# Altium PCB CanBusTester.PcbDoc
Units mil, origin at the board's own origin, x right, y up, seen from the top; angles counter-clockwise.
Board outline 6000 x 4000 mil, 2 copper layers (Top Layer, Bottom Layer); 28 components, 38 nets, 206 pads, 0 vias.
Unrouted connection lines stored in the file: 95.
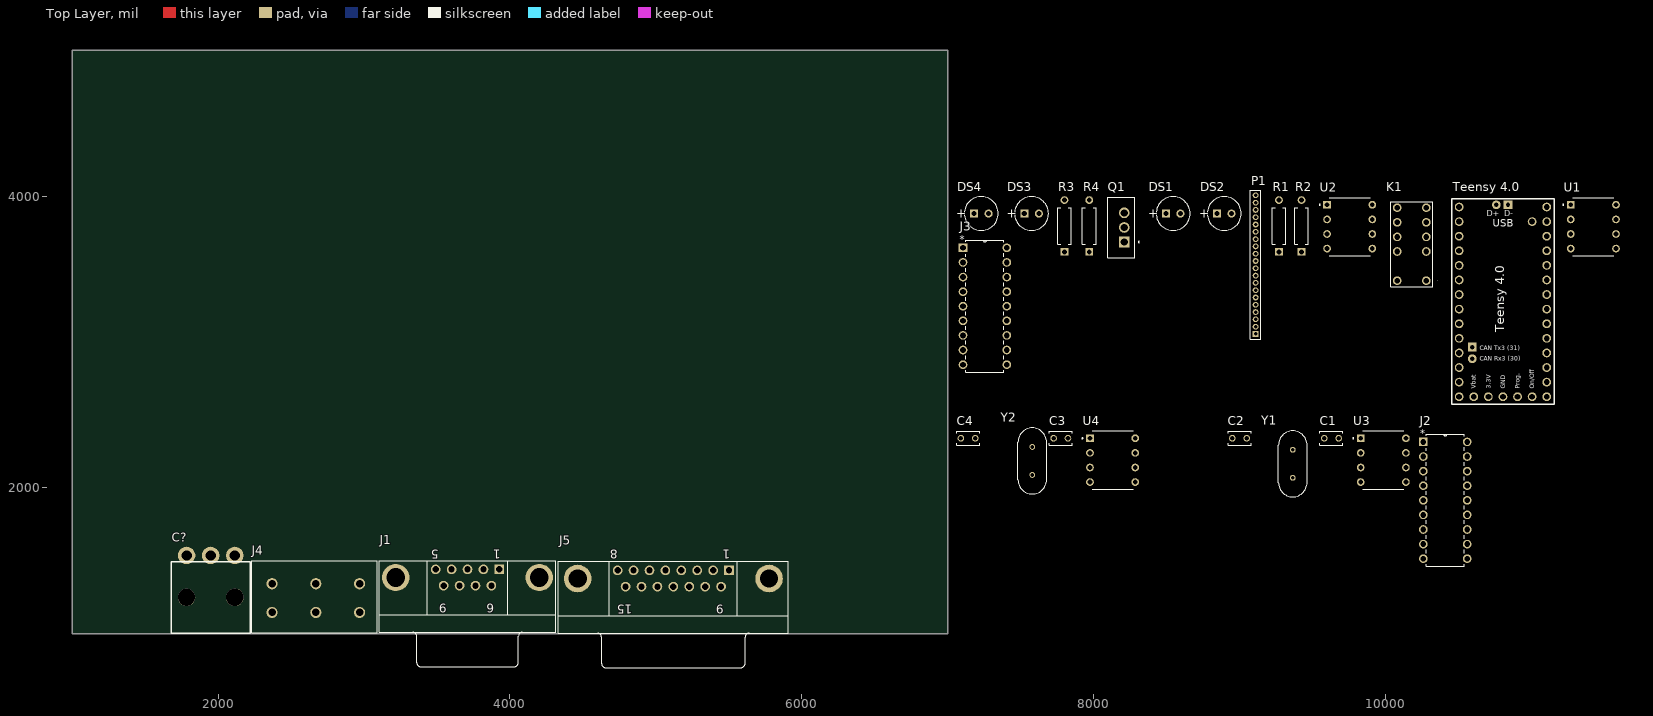
[diagram p0: Top Layer view]
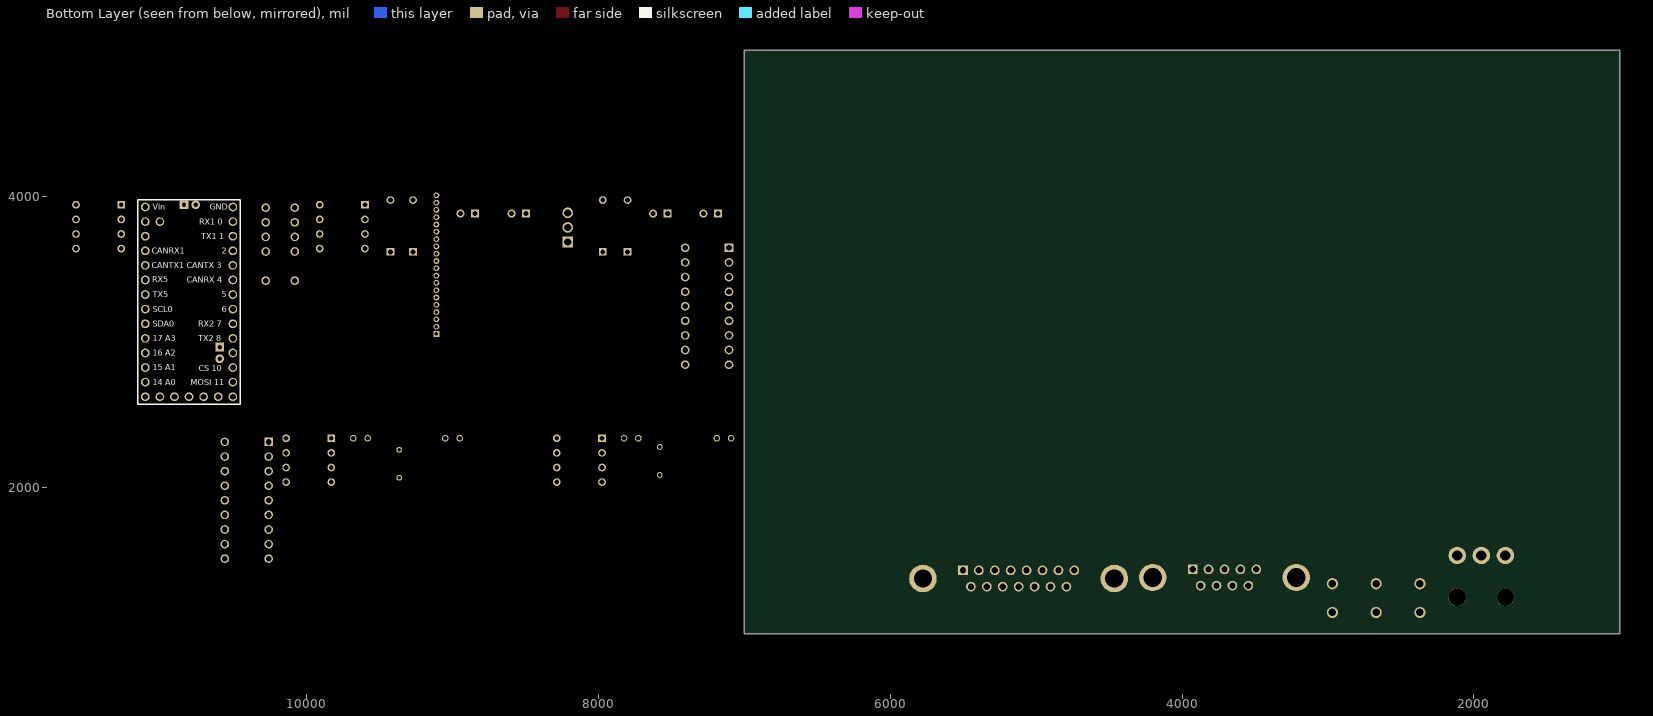
[diagram p1: Bottom Layer view, seen from below]

## Layer stack, top to bottom
Top Solder: solder mask 0.4, Solder Resist, Dk 3.5
Top Layer: signal copper 1.4
Dielectric 1: dielectric 12.6, FR-4, Dk 4.8
Bottom Layer: signal copper 1.4
Bottom Solder: solder mask 0.4, Solder Resist, Dk 3.5

## Board outline
1000,1000 7000,1000 7000,5000 1000,5000

## Design rules (kind name [scope] priority, off if disabled: settings)
Clearance [All] p1: gap=10 ignorepadtopadclearanceinfootprint=FALSE except(0: Arc-Hole Track-Hole SMDPad-Hole THPad-Hole Via-Hole Fill-Hole Poly-Hole Region-Hole Text-Hole)
PolygonConnect [All] p1: connectstyle=Relief reliefconductorwidth=10 reliefentries=4 polygonreliefangle="90 Angle" airgapwidth=10
RoomDefinition Connectors [InComponentClass('Connectors')] p1: confinementstyle=ConfineIn formatcopy=TRUE lockcomponents=FALSE outline 7045,4160 9900,4160 9900,5860 7045,5860
RoomDefinition CircuitBoard [InComponentClass('CircuitBoard')] p2: confinementstyle=ConfineIn formatcopy=TRUE lockcomponents=FALSE outline 7045,2565 11625,2565 11625,4110 7045,4110
RoomDefinition CanControllers [InComponentClass('CanControllers')] p3: confinementstyle=ConfineIn formatcopy=TRUE lockcomponents=FALSE outline 7045,1060 10720,1060 10720,2510 7045,2510
RoutingVias [All] p1: holewidth=28 width=50 viastyle="Through Hole" minholewidth=28 minwidth=50 maxholewidth=28 maxwidth=50
SolderMaskExpansion [All] p1: expansion=4 istentingtop=FALSE
Width [All] p1: maxlimit=10 minlimit=10 preferedwidth=10
30 further rules are at their usual default settings.

## Classes and differential pairs
component class Connectors: C? J1 J4 J5
component class CircuitBoard: DS1 DS2 DS3 DS4 K1 P1 Q1 R1 R2 R3 R4 "Teensy 4.0" U1 U2
component class CanControllers: C1 C2 C3 C4 J2 J3 U3 U4 Y1 Y2

## Components (designator, comment, footprint, x,y, rotation, side; value= is the part's Value field where it differs from the comment)
C1 "FG18C0G2A180JNT06" CAPRB250W50L400T250H550 9630,2340 r0 top
C2 "FG18C0G2A180JNT06" CAPRB250W50L400T250H550 9000,2340 r0 top
C3 "FG18C0G2A180JNT06" CAPRB250W50L400T250H550 7775,2340 r0 top
C4 "FG18C0G2A180JNT06" CAPRB250W50L400T250H550 7140,2340 r0 top
C? "3PinMolex" 3PinMolex 1949.5,1249 r0 top
DS1 "WP7113SGC" KING-WP7113SGC_V 8545,3880 r0 top
DS2 "WP7113SGC" KING-WP7113SGC_V 8895,3880 r0 top
DS3 "WP7113SGC" KING-WP7113SGC_V 7575,3880 r0 top
DS4 "WP7113SGC" KING-WP7113SGC_V 7230,3880 r0 top
J1 "D Connector 9" DSUB1.385-2H9 3709.53,1011.89 r180 top
J2 "MCP2515-I/P" DIP254P762X432-18 10560,1515 r0 top
J3 "MCP2515-I/P" DIP254P762X432-18 7405,2845 r0 top
J4 "691411410003" 691411410003 2670,1245 r180 top
J5 "D Connector 15" DSUB1.385-2H15 5120,1005 r180 top
K1 "G6SK-2-DC5" G6SK2DC5 10280,3420 r90 top
P1 "320x480TFT" MHDR1X20 9110,3055 r90 top
Q1 "LM7805CT/NOPB" TO254P1054X470X1955-3 8210,3785 r90 top
R1 "MFR-25FBF52-221R" RESA60-630X240 9270,3795 r90 top value=221
R2 "MFR-25FBF52-221R" RESA60-630X240 9425,3795 r90 top value=221
R3 "MFR-25FBF52-221R" RESA60-630X240 7800,3795 r90 top value=221
R4 "MFR-25FBF52-221R" RESA60-630X240 7970,3795 r90 top value=221
"Teensy 4.0" "Teensy_4.0" "Teensy 4.0" 10505,2625 r0 top
U1 "MCP2562-E/P" DIP787W45P254L1016H533Q8 11425,3790 r0 top
U2 "MCP2562-E/P" DIP787W45P254L1016H533Q8 9755,3790 r0 top
U3 "MCP2562-E/P" DIP787W45P254L1016H533Q8 9985,2190 r0 top
U4 "MCP2562-E/P" DIP787W45P254L1016H533Q8 8130,2190 r0 top
Y1 "ABL-16.000MHZ-B2" XTAL_HC49P488W46L1150T500H350 9365,2165 r90 top
Y2 "ABL-16.000MHZ-B2" XTAL_HC49P488W46L1150T500H350 7580,2185 r90 top

## Footprints (in the part's own frame and the unit in brackets; to place one, negate y for a bottom-side part, rotate by r counter-clockwise, add the part's x,y. Pads: shape width x height; smd on the part's side, far side on the other; paste and mask are expansions set on the pad)
3PinMolex [mil]
  round 120 hole 118: 0(-165.5,1) 0(165.5,1)
  round 120 hole 71: 1(-165,288) 2(0,288) 3(165,288)
  silkscreen extent -270,-245 270,245
691411410003 [mm]
  round 1.95 hole 1.3: 1(-7.62,2.5) 2(0,2.5) 3(7.62,2.5) A1(-7.62,-2.5) A2(0,-2.5) A3(7.62,-2.5)
  silkscreen extent -10.7,-6.5 11.12,6
CAPRB250W50L400T250H550 [mm]
  round 1.15 hole 0.8: 1(-1.25,0) 2(1.25,0)
  silkscreen extent -2,-1.25 2,1.25
DIP254P762X432-18 [mil]
  rect 59x59 hole 39: 1(-300,800)
  round 59 hole 39: 2(-300,700) 3(-300,600) 4(-300,500) 5(-300,400) 6(-300,300) 7(-300,200) 8(-300,100) 9(-300,0) 10(0,0) 11(0,100) 12(0,200) 13(0,300) 14(0,400) 15(0,500) 16(0,600) 17(0,700) 18(0,800)
  silkscreen extent -280,-53 -20,853, body extent -155,-450 155,450, height 210
DIP787W45P254L1016H533Q8 [mil]
  rect 52.68x52.68 hole 32.68: 1(-155,150)
  round 52.68 hole 32.68: 2(-155,50) 3(-155,-50) 4(-155,-150) 5(155,-150) 6(155,-50) 7(155,50) 8(155,150)
  silkscreen extent -210,-200 140,200
DSUB1.385-2H9 [mm] "Connector; D Subminiature; 9 Position; Right Angle; Pitch 1.385 mm"
  rect 1.69x1.69 hole 1.09: 1(-5.54,-10.92)
  round 1.69 hole 1.09: 2(-2.77,-10.92) 3(0,-10.92) 4(2.77,-10.92) 5(5.54,-10.92) 6(-4.155,-8.08) 7(-1.385,-8.08) 8(1.385,-8.08) 9(4.155,-8.08)
  round 4.76 hole 3.26: 10(-12.495,-9.5) 11(12.495,-9.5)
  silkscreen extent -15.4,-12.4 15.4,6
DSUB1.385-2H15 [mm] "Connector; D Subminiature; 15 Position; Right Angle; Pitch 1.385 mm"
  rect 1.69x1.69 hole 1.09: 1(-9.695,-10.92)
  round 1.69 hole 1.09: 2(-6.925,-10.92) 3(-4.155,-10.92) 4(-1.385,-10.92) 5(1.385,-10.92) 6(4.155,-10.92) 7(6.925,-10.92) 8(9.695,-10.92) 9(-8.31,-8.08) 10(-5.54,-8.08) 11(-2.77,-8.08) 12(0,-8.08) 13(2.77,-8.08) 14(5.54,-8.08) 15(8.31,-8.08)
  round 4.8 hole 3.18: 16(-16.66,-9.5) 17(16.66,-9.5)
  silkscreen extent -20,-12.5 20,6
G6SK2DC5 [mm]
  round 1.5 hole 1: 1(0,0) 3(5.08,0) 4(7.62,0) 5(10.16,0) 6(12.7,0) 7(12.7,5.08) 8(10.16,5.08) 9(7.62,5.08) 10(5.08,5.08) 12(0,5.08)
  silkscreen extent -1.05,-1.97 13.75,6.19, body extent -1.05,-1.11 13.75,6.19, height 9.5
KING-WP7113SGC_V [mm] "THD, 2-Leads, Dia 5.9mm, Body Length 8.6mm"
  rect 1.4x1.4 hole 0.889: 1(-1.27,0)
  round 1.4 hole 0.889: 2(1.27,0)
  silkscreen extent -2.95,-2.95 2.95,2.95, body extent -2.95,-2.95 2.5,2.95, height 15.5
MHDR1X20 [mm] "Connector; Header; 20 Position"
  rect 1x1 hole 0.6: 1(0,0)
  round 1 hole 0.6: 2(1.27,0) 3(2.54,0) 4(3.81,0) 5(5.08,0) 6(6.35,0) 7(7.62,0) 8(8.89,0) 9(10.16,0) 10(11.43,0) 11(12.7,0) 12(13.97,0) 13(15.24,0) 14(16.51,0) 15(17.78,0) 16(19.05,0) 17(20.32,0) 18(21.59,0) 19(22.86,0) 20(24.13,0)
  silkscreen extent -0.9,-0.9 25.03,0.9
RESA60-630X240 [mm] "Axial Resistor, 2-Leads, Dia 2.4mm, Body Length 6.3mm"
  rect 1.35x1.35 hole 0.85: 1(-4.5,0)
  round 1.35 hole 0.85: 2(4.5,0)
  silkscreen extent -3.15,-1.2 3.15,1.2, body extent -4.77,-1.19 4.77,1.2, height 2.4
"Teensy 4.0" [mil] "32 bit Arduino Compatible Microcontroller www.pjrc.com/teensy"
  round 60 hole 40: 0(0,1200) 1(0,1100) 2(0,1000) 3(0,900) 3V3a(600,1100) 3V3b(200,0) 4(0,800) 5(0,700) 6(0,600) 7(0,500) 8(0,400) 9(0,300) 10(0,200) 11(0,100) 12(0,0) 13(600,0) 14(600,100) 15(600,200) 16(600,300) 17(600,400) 18(600,500) 19(600,600) 20(600,700) 21(600,800) 22(600,900) 23(600,1000) G1(0,1300) G2(600,1200) G3(300,0) On(500,0) P(400,0) VBat(100,0) Vin(600,1300) VUSB(500,1200)
  round 60 hole 30: CRX3(90,260) D+(255,1315)
  rect 60x60 hole 30: CTX3(90,340) D-(335,1315)
  silkscreen extent -50,-50 650,1355
TO254P1054X470X1955-3 [mm]
  rect 1.86x1.86 hole 1.24: 1(-2.54,0)
  round 1.86 hole 1.24: 2(0,0) 3(2.54,0)
  silkscreen extent -5.27,-2.64 5.27,2.86
XTAL_HC49P488W46L1150T500H350 [mm]
  round 1.007 hole 0.657: 1(-2.44,0) 2(2.44,0)
  silkscreen extent -5.75,-2.5 5.75,2.5, body extent -5.75,-3.25 5.75,5.75, height 2.5

## Part data
C1 C2 C3 C4: "Cap Ceramic 18pF 100V C0G 5% Radial 2.5mm 125Â°C Ammo", Package="Radial TDK Corporation", Availability="In Stock", Check_prices=https://www.snapeda.com/parts/FG18C0G2A180JNT06/TDK/view-part/?ref=eda, MF=TDK, MP=FG18C0G2A180JNT06, Price=None, Purchase-URL=https://pricing.snapeda.com/search/part/FG18C0G2A180JNT06/?ref=eda, SnapEDA_Link=https://www.snapeda.com/parts/FG18C0G2A180JNT06/TDK/view-part/?ref=snap
DS1 DS2 DS3 DS4: library part CMP-007-00032-2, "The Super Bright Green Source Color Device, 2.2 V, -40 to 85 degC, 2-Pin THD, RoHS, Tape and Reel", Case/Package=Radial, Colour=Green, Forward Voltage=2.2V, Manufacturer=Kingbright, Package Description="2-Pin Through Hole Device, Dia 5.9 mm, Body Length 8.6 mm", Package Quantity=1000, Datasheet URL=http://www.kingbrightusa.com/images/catalog/SPEC/WP7113SGC.pdf, Datasheet Version="Rev. 9B, 01/2015", Illumination Colour=Green, Lens Style=Clear, Luminous Intensity=200mcd, Mounting Technology=TH, Nominal Vf=2.2V, Package Reference=WP7113SGC, Packaging=Bulk, RoHS Compliant=True, Viewing Angle=20degrees
J1: "Receptacle Assembly, 9 Position, Right Angle", PackageDocument=O, DatasheetDocument=1-Sep-1999, Gender=Receptacle, LatestRevisionDate=17-Jul-2002, LatestRevisionNote="Re-released for DXP Platform.", Orientation="Right Angle", PackageReference=788750, Positions=9, Published=15-Jun-2001, Publisher="Altium Limited"
J2 J3: "CAN 1Mbps Sleep/Standby 3.3V/5V 18-Pin PDIP Tube", Package="PDIP-18 Micrel", Availability="In Stock", Check_prices=https://www.snapeda.com/parts/MCP2515-I/P/Microchip/view-part/?ref=eda, MF="Microchip Technology", MP=MCP2515-I/P, Price=None, Purchase-URL=https://pricing.snapeda.com/search/part/MCP2515-I/P/?ref=eda, SnapEDA_Link=https://www.snapeda.com/parts/MCP2515-I/P/Microchip/view-part/?ref=snap
J4: "TERM BLK 3P SIDE ENT 7.62MM PCB", Package=None, Availability="In Stock", Check_prices=https://www.snapeda.com/parts/691411410003/Wurth+Electronics+Inc/view-part/?ref=eda, MF="Wurth Electronics Inc.", MP=691411410003, Price=None, Purchase-URL=https://pricing.snapeda.com/search/part/691411410003/?ref=eda, SnapEDA_Link=https://www.snapeda.com/parts/691411410003/Wurth+Electronics+Inc/view-part/?ref=snap
J5: "Receptacle Assembly, 15 Position, Right Angle", PackageDocument=O, DatasheetDocument=1-Sep-99, Gender=Receptacle, LatestRevisionDate=17-Jul-2002, LatestRevisionNote="Re-released for DXP Platform.", Orientation="Right Angle", PackageReference=788757, Positions=15, Published=15-Jun-2001, Publisher="Altium Limited"
K1: "Relay or Contactor", Manufacturer_Name="Omron Electronics", Mouser Part Number=653-G6SK-2-DC5, Datasheet Link=https://componentsearchengine.com/Datasheets/1/G6SK-2-DC5.pdf, Height=9.4mm, Manufacturer_Part_Number=G6SK-2-DC5, Mouser Price/Stock=https://www.mouser.co.uk/ProductDetail/Omron-Electronics/G6SK-2-DC5?qs=Mrnyg3lK62HQss%2FMQAyqbw%3D%3D
P1: library part MHDR1X20, "Header, 20-Pin", LatestRevisionDate=17-Jul-2002, LatestRevisionNote="Re-released for DXP Platform.", Publisher="Altium Limited"
Q1: Package=None, Availability=Unavailable, MP=LM7805CT/NOPB, Price=None
R1 R2 R3 R4: library part CMP-009-00051-4, "Axial Resistor, 221 Ohm, +/- 1%, 250 mW, -55 to 155 degC, 2-Pin THD, RoHS, Bulk", Case/Package=Axial, Manufacturer=Yageo, Max Operating Temperature=155°C, Min Operating Temperature=-55°C, Package Description="2-Pin Axial Lead, Dia 2.4 mm, Body Length 6.3 mm", Package Quantity=200, Package Reference=MFR-25, Power=250mW, Tolerance=1%, Voltage Rating=250V, Datasheet URL=http://www.yageo.com/documents/recent/Yageo%20LR_MFR_2013.pdf, Datasheet Version=Apr-13, Manufacturer URL=http://www.yageo.com/, Mounting Technology=TH, Packaging=Bulk, RoHS Compliant=True
"Teensy 4.0": library part CMP-006-000003-1, "32 Bit Arduino-Compatible iMX Microcontroller", Manufacturer=PRJC, PartNumber="Teensy 4.0", Component Type=Standard, Design Item ID=Teensy_4.0, Pin Count=38, Source=Teensy.SchLib
U1 U2 U3 U4: library part CMP-003-000000-1, "1/1 Transceiver Half CANbus 8-PDIP", Package="DIP-8 Microchip", Component Type=Standard, Design Item ID=MCP2562-E/P, Digi-Key_Part_Number=MCP2562-E/P-ND, DigiKey-Purchase-URL=https://snapeda.com/shop?store=DigiKey&id=290285, MF=Microchip, MP=MCP2562-E/P, Pin Count=8, SnapEDA_Link=https://www.snapeda.com/parts/MCP2562-E/P/Microchip/view-part/290285/?ref=snap, Source=SnapEDAsch.SchLib
Y1 Y2: "HC/49US (AT49) MICROPROCESSOR CRYSTAL", Package="HC-49/US ABRACON", Availability="In Stock", Check_prices=https://www.snapeda.com/parts/ABL-16.000MHZ-B2/Abracon+LLC/view-part/?ref=eda, MF=Abracon, MP=ABL-16.000MHZ-B2, Price=None, Purchase-URL=https://pricing.snapeda.com/search/part/ABL-16.000MHZ-B2/?ref=eda, SnapEDA_Link=https://www.snapeda.com/parts/ABL-16.000MHZ-B2/Abracon+LLC/view-part/?ref=snap

## Nets (pads, with @x,y where several pads share a name; then routed paths per layer and width w, separated by ;. In a path a pad name is that pad's centre, name@x,y a point inside that pad or via, vN(x,y) a via of type N, cw(c..) or ccw(c..) an arc to the next point about the centre after c; other vN are vias at no path point)
+12: Q1.1
GND: "Teensy 4.0.G3" C1.1 C2.1 C3.1 C4.1 C?.1 DS1.2 DS2.2 DS3.2 DS4.2 J1.10 J1.11 J2.9 J3.9 J4.3 J4.A3 J5.16 J5.17 P1.20 Q1.2 U1.2 U1.8 U2.2 U2.8 U3.2 U3.8 U4.2 U4.8
NetC1_2: C1.2 J2.8 Y1.2
NetC2_2: C2.2 J2.7 Y1.1
NetC3_2: C3.2 J3.8 Y2.2
NetC4_2: C4.2 J3.7 Y2.1
NetC?_2: C?.2 J1.2 J4.2 J4.A2 J5.10 K1.9 U1.6 U3.6
NetC?_3: C?.3 J1.7 J4.1 J4.A1 J5.5 K1.4 U1.7 U3.7
NetDS1_1: DS1.1 R1.2
NetDS2_1: DS2.1 R2.2
NetDS3_1: DS3.1 R4.2
NetDS4_1: DS4.1 R3.2
NetJ1_4: J1.4 J5.4 K1.8 U2.6 U4.6
NetJ1_8: J1.8 J5.3 K1.5 U2.7 U4.7
NetJ2_1: J2.1 U3.1
NetJ2_2: J2.2 U3.4
NetJ2_13: "Teensy 4.0.13" J2.13 J3.13 P1.17
NetJ2_14: "Teensy 4.0.11" J2.14 J3.14 P1.15
NetJ2_15: "Teensy 4.0.12" J2.15 J3.15 P1.16
NetJ2_16: "Teensy 4.0.9" J2.16
NetJ2_18: "Teensy 4.0.Vin" J2.18 J3.18 P1.19 Q1.3 U1.3 U2.3 U3.3 U4.3
NetJ3_1: J3.1 U4.1
NetJ3_2: J3.2 U4.4
NetJ3_16: "Teensy 4.0.10" J3.16
NetP1_10: P1.10
NetP1_11: P1.11
NetP1_12: P1.12
NetP1_13: P1.13
NetP1_14: "Teensy 4.0.8" P1.14
NetR1_1: "Teensy 4.0.2" R1.1
NetR2_1: "Teensy 4.0.3" R2.1
NetR3_1: "Teensy 4.0.5" R3.1
NetR4_1: "Teensy 4.0.4" R4.1
"NetTeensy 4.0_0": "Teensy 4.0.0" U2.4
"NetTeensy 4.0_1": "Teensy 4.0.1" U2.1
"NetTeensy 4.0_6": "Teensy 4.0.6"
"NetTeensy 4.0_22": "Teensy 4.0.22" "Teensy 4.0.CRX3" U1.1
"NetTeensy 4.0_23": "Teensy 4.0.23" "Teensy 4.0.CTX3" U1.4
pads on no net: "Teensy 4.0.3V3a" "Teensy 4.0.3V3b" "Teensy 4.0.7" "Teensy 4.0.14" "Teensy 4.0.15" "Teensy 4.0.16" "Teensy 4.0.17" "Teensy 4.0.18" "Teensy 4.0.19" "Teensy 4.0.20" "Teensy 4.0.21" "Teensy 4.0.D+" "Teensy 4.0.D-" "Teensy 4.0.G1" "Teensy 4.0.G2" "Teensy 4.0.On" "Teensy 4.0.P" "Teensy 4.0.VBat" "Teensy 4.0.VUSB" C?.0 J1.1 J1.3 J1.5 J1.6 J1.9 J2.3 J2.4 J2.5 J2.6 J2.10 J2.11 J2.12 J2.17 J3.3 J3.4 J3.5 J3.6 J3.10 J3.11 J3.12 J3.17 J5.1 J5.2 J5.6 J5.7 J5.8 J5.9 J5.11 J5.12 J5.13 J5.14 J5.15 K1.1 K1.3 K1.6 K1.7 K1.10 K1.12 P1.1 P1.2 P1.3 P1.4 P1.5 P1.6 P1.7 P1.8 P1.9 P1.18 U1.5 U2.5 U3.5 U4.5

## Text inside footprints (layer, text, board x,y; h text height)
DS1: Top Overlay "+" at 8375,3850 h59.06
DS2: Top Overlay "+" at 8725,3850 h59.06
DS3: Top Overlay "+" at 7405,3850 h59.06
DS4: Top Overlay "+" at 7060,3850 h59.06
J1: Top Overlay "6" at 3892.8,1207.76 h59.06 r180; Top Overlay "9" at 3565.63,1207.76 h59.06 r180; Top Overlay "5" at 3511.1,1577.83 h59.06 r180; Top Overlay "1" at 3937.48,1577.83 h59.06 r180
J2: Top Overlay "*" at 10237,2349 h50; Mechanical 13 "*" at 10237,2349 h50
J3: Top Overlay "*" at 7082,3679 h50; Mechanical 13 "*" at 7082,3679 h50
J4: Mechanical 13 "1" at 2970,1245 h50 r180
J5: Top Overlay "9" at 5466.85,1200.87 h59.06 r180; Top Overlay "15" at 4837.13,1200.87 h59.06 r180; Top Overlay "8" at 4740,1574.88 h59.06 r180; Top Overlay "1" at 5511.54,1574.88 h59.06 r180
"Teensy 4.0": Top Overlay "CAN Tx3 (31)" at 10645,2945 h30; Top Overlay "CAN Rx3 (30)" at 10645,2870 h30; Top Overlay "USB" at 10735,3790 h50; Top Overlay "D+  D-" at 10695,3860 h40; Top Overlay "Vbat" at 10620,2680 h30 r90; Top Overlay "3.3V" at 10720,2680 h30 r90; Top Overlay "GND" at 10820,2680 h30 r90; Top Overlay "Prog." at 10920,2680 h30 r90; Top Overlay "On/Off" at 11020,2680 h30 r90; Bottom Overlay "15 A1" at 11054.93,2805 h40; Bottom Overlay "14 A0" at 11054.93,2705 h40; Bottom Overlay "17 A3" at 11054.93,3005 h40; Bottom Overlay "Vin" at 11054.93,3905 h40; Bottom Overlay "16 A2" at 11054.93,2905 h40; Bottom Overlay "SCL0" at 11054.93,3205 h40; Bottom Overlay "SDA0" at 11054.93,3105 h40; Bottom Overlay "TX5" at 11054.93,3305 h40; Bottom Overlay "6" at 10581.68,3205 h40; Bottom Overlay "5" at 10581.68,3305 h40; Bottom Overlay "2" at 10581.68,3605 h40; Bottom Overlay "CS 10" at 10740,2800 h40; Bottom Overlay "TX1 1" at 10721.64,3705 h40; Bottom Overlay "MOSI 11" at 10795,2705 h40; Bottom Overlay "TX2 8" at 10741.63,3005 h40; Bottom Overlay "RX2 7" at 10741.63,3105 h40; Bottom Overlay "RX1 0" at 10734.97,3805 h40; Bottom Overlay "GND" at 10661.66,3905 h40; Bottom Overlay "CANRX 4" at 10821.61,3405 h40; Bottom Overlay "CANTX 3" at 10821.61,3505 h40; Bottom Overlay "CANRX1" at 11061.61,3605 h40; Bottom Overlay "CANTX1" at 11061.61,3505 h40; Bottom Overlay "RX5" at 11056.61,3410 h40